# Altium PCB PCB1.PcbDoc
Units mil, origin at the board's own origin, x right, y up, seen from the top; angles counter-clockwise.
Board outline 3570 x 2300 mil, 2 copper layers (Top Layer, Bottom Layer); 32 components, 31 nets, 120 pads, 0 vias.
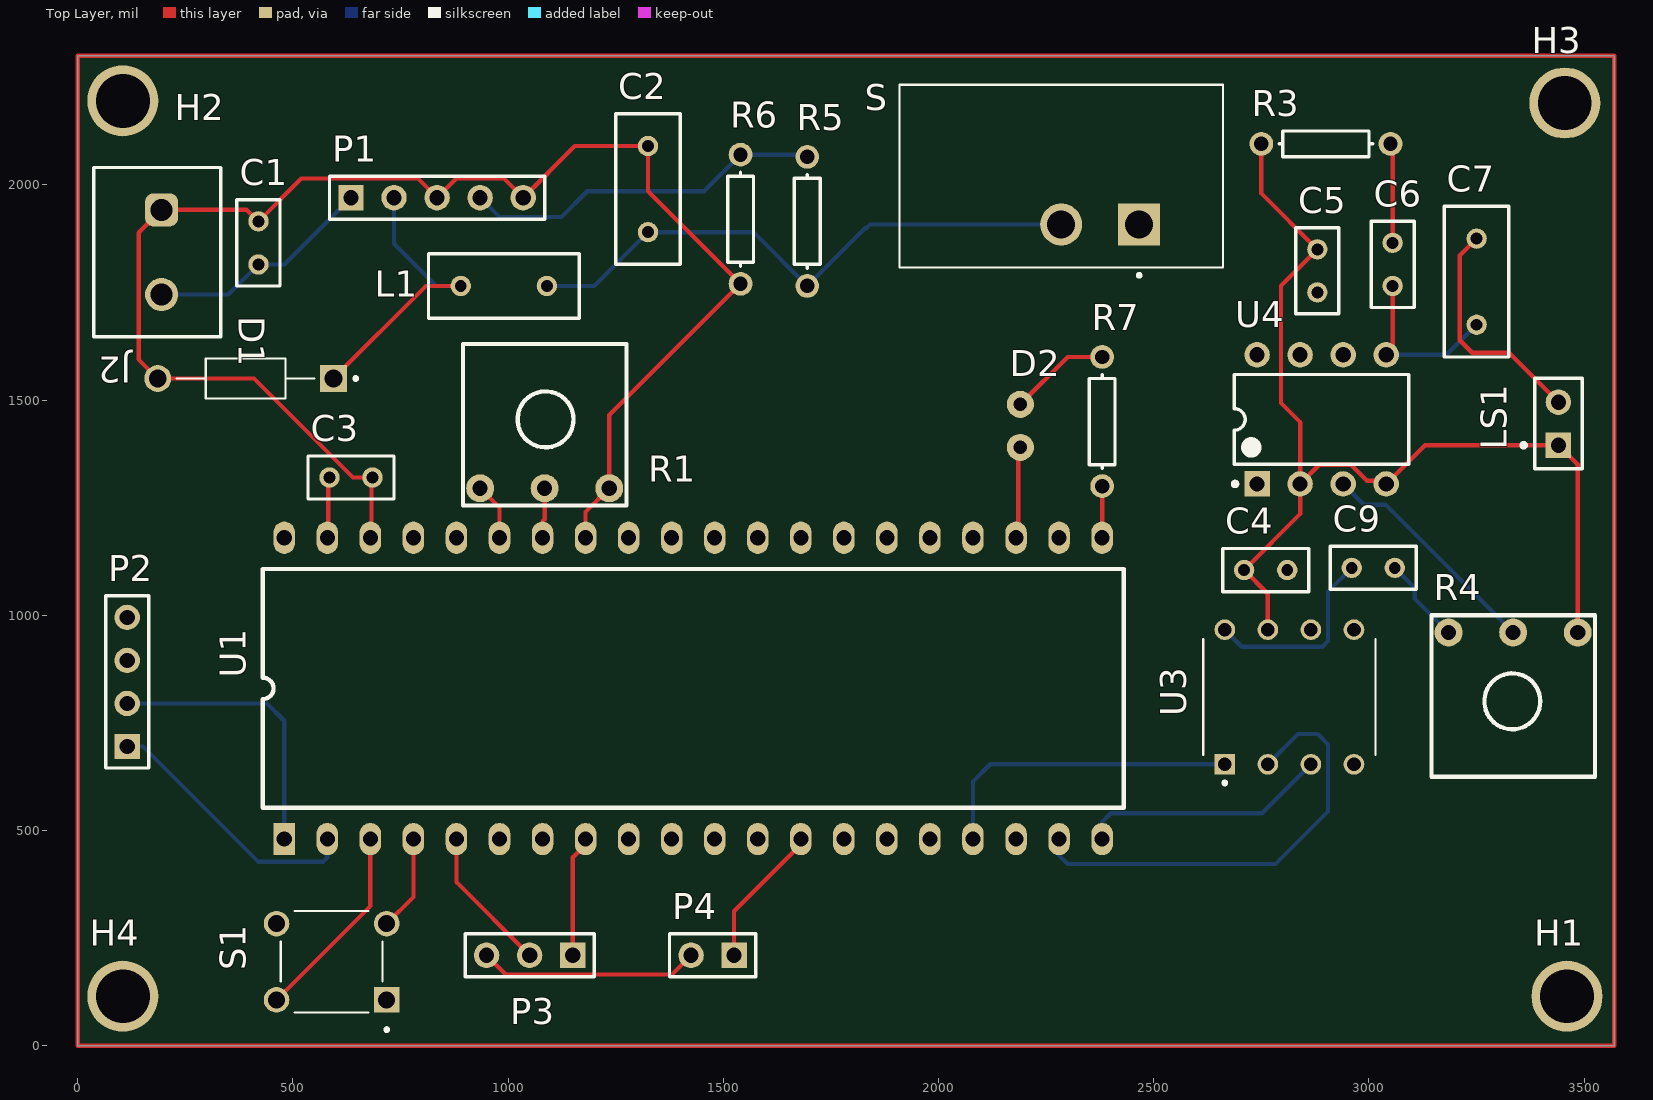
[diagram p0: Top Layer view]
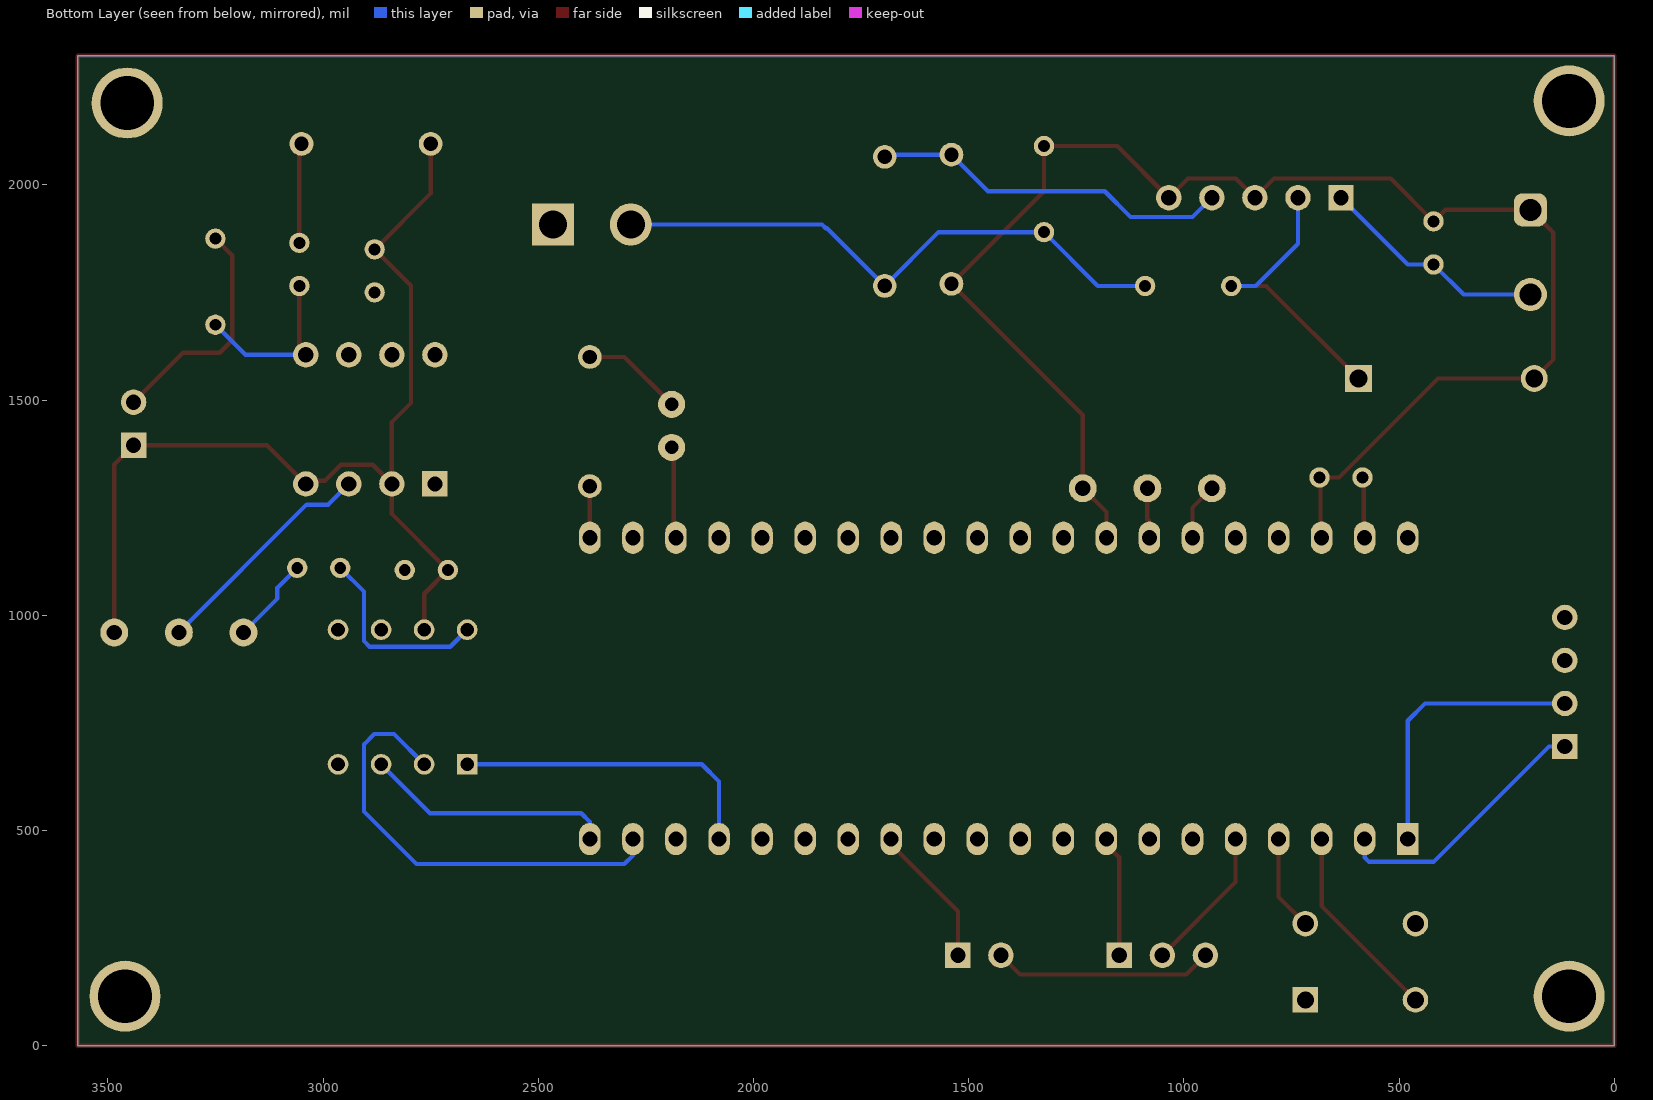
[diagram p1: Bottom Layer view, seen from below]

## Layer stack, top to bottom
Top Solder: solder mask 0.4, Solder Resist, Dk 3.5
Top Layer: signal copper 1.4
Dielectric 1: dielectric 12.6, FR-4, Dk 4.8
Bottom Layer: signal copper 1.4
Bottom Solder: solder mask 0.4, Solder Resist, Dk 3.5

## Board outline
0,0 0,2300 3570,2300 3570,0

## Design rules (kind name [scope] priority, off if disabled: settings)
Clearance [All] p1: gap=10 ignorepadtopadclearanceinfootprint=FALSE
PolygonConnect [All] p1: connectstyle=Relief reliefconductorwidth=10 reliefentries=4 polygonreliefangle="90 Angle" airgapwidth=10
RoutingVias [All] p1: holewidth=28 width=50 viastyle="Through Hole" minholewidth=28 minwidth=50 maxholewidth=28 maxwidth=50
SolderMaskExpansion [All] p1: expansion=4 istentingtop=FALSE
SupplyNets "Schematic Supply Nets_1" [InNet('VCC')] p1: voltage=0.000
SupplyNets "Schematic Supply Nets" [InNet('GND')] p2: voltage=0.000
Width [All] p1: maxlimit=10 minlimit=10 preferedwidth=10
30 further rules are at their usual default settings.

## Components (designator, comment, footprint, x,y, rotation, side; value= is the part's Value field where it differs from the comment)
C1 "Cap" RAD-0.1 420,1865 r90 top value=100uF
C2 "Cap" RAD-0.2 1325,1990 r270 top value=1000uF
C3 "Cap" RAD-0.1 635,1320 r180 top value=10uF
C4 "Cap" RAD-0.1 2760,1105 r180 top value=0.1u
C5 "Cap" RAD-0.1 2880,1800 r90 top value=0.1u
C6 "Cap" RAD-0.1 3055,1815 r90 top value=0.05u
C7 "Cap" RAD-0.2 3250,1775 r90 top value=250u
C9 "Cap" RAD-0.1 3010,1110 r180 top value=1u
D1 "1N5819" DIOAD1036W78L470D235 390,1550 r180 top
D2 "LED1" LED-1 2190,1440 r0 top
H1 "Hole 125mil" "Hole 125mil" 3460,115 r0 top
H2 "Hole 125mil" "Hole 125mil" 105,2195 r0 top
H3 "Hole 125mil" "Hole 125mil" 3455,2190 r0 top
H4 "Hole 125mil" "Hole 125mil" 105,115 r0 top
J2 "691137710002" 691137710002 185.16,1843.43 r270 top
L1 "Inductor" RAD-0.2 990,1765 r0 top value=100uH
LS1 "Speaker" PIN2 3440,1395 r90 top
P1 "Header 5" HDR1X5 635,1970 r0 top
P2 "Header 4" HDR1X4 115,695 r90 top
P3 "Header 3" HDR1X3 1150,210 r180 top
P4 "Header 2H" HDR1X2 1525,210 r180 top
R1 "RPot_1" "POT inline wide" 985,1295 r0 top value=10K
R3 "Res1" AXIAL-0.3 2900,2095 r180 top value=10
R4 "RPot_1" "POT inline wide" 3435,960 r180 top value=10K
R5 "Res1" AXIAL-0.3 1695,1915 r270 top value=3k
R6 "Res1" AXIAL-0.3 1540,1920 r90 top value=1k
R7 "Res1" AXIAL-0.3 2380,1450 r90 top value=1K
S "L101011MS02Q" SW_L101011MS02Q 2285,2020 r180 top
S1 "TS02-66-43-BK-100-LCR-D" SW_TS02-66-43-BK-100-LCR-D 590,195 r180 top
U1 "Raspberry Pi Pico" "Raspberry Pi Pico" 480,480 r90 top
U3 "LTC1661CN8#PBF" DIP794W45P254L1016H393Q8 2815,810 r90 top
U4 "LM386N-1" DIP-8 2890,1455 r90 top

## Footprints (in the part's own frame and the unit in brackets; to place one, negate y for a bottom-side part, rotate by r counter-clockwise, add the part's x,y. Pads: shape width x height; smd on the part's side, far side on the other; paste and mask are expansions set on the pad)
691137710002 [mm] "Horizontal Cable Entry with Pressure Clamp, pitch 5mm, 02p"
  rrect50% 1.95x1.95 hole 1.3: 1(-2.5,0.25)
  round 1.95 hole 1.3: 2(2.5,0.25)
  silkscreen extent -5,-3.75 5,3.75, body extent -5,-3.75 5,3.75, height 11.6
AXIAL-0.3 [mm] "Axial Device, Thru-Hole; 2 Leads; 0.3 in Pin Spacing"
  round 1.4 hole 0.85: 1(-3.81,0) 2(3.81,0)
  silkscreen extent -2.77,-0.76 2.77,0.76
DIOAD1036W78L470D235 [mm]
  round 1.59 hole 1.06: A(5.18,0)
  rect 1.59x1.59 / inner round 1.59 / far side rect 1.59x1.59 hole 1.06: C(-5.18,0)
  silkscreen extent -6.6,-1.18 4.07,1.18, body extent -5.55,-1.4 5.55,1.4, height 2.8
DIP794W45P254L1016H393Q8 [mm]
  rect 1.22x1.22 hole 0.81: 1(-3.97,3.81)
  round 1.22 hole 0.81: 2(-3.97,1.27) 3(-3.97,-1.27) 4(-3.97,-3.81) 5(3.97,-3.81) 6(3.97,-1.27) 7(3.97,1.27) 8(3.97,3.81)
  silkscreen extent -5.17,-5.08 3.43,5.08
DIP-8 [mm]
  rect 1.5x1.5 hole 0.9: 1(-3.81,3.81)
  round 1.5 hole 0.9: 2(-3.81,1.27) 3(-3.81,-1.27) 4(-3.81,-3.81) 5(3.81,-3.81) 6(3.81,-1.27) 7(3.81,1.27) 8(3.81,3.81)
  silkscreen extent -3.93,-5.15 2.65,5.23, body extent -3.6,-5.15 3.6,5.15, height 5.08
HDR1X2 [mm] "Connector; Header; 2 Position"
  rect 1.5x1.5 hole 0.9: 1(0,0)
  round 1.5 hole 0.9: 2(2.54,0)
  silkscreen extent -1.27,-1.27 3.81,1.27
HDR1X3 [mm] "Connector; Header; 3 Position"
  rect 1.5x1.5 hole 0.9: 1(0,0)
  round 1.5 hole 0.9: 2(2.54,0) 3(5.08,0)
  silkscreen extent -1.27,-1.27 6.35,1.27
HDR1X4 [mm] "Connector; Header; 4 Position"
  rect 1.5x1.5 hole 0.9: 1(0,0)
  round 1.5 hole 0.9: 2(2.54,0) 3(5.08,0) 4(7.62,0)
  silkscreen extent -1.27,-1.27 8.89,1.27
HDR1X5 [mm] "Connector; Header; 5 Position"
  rect 1.5x1.5 hole 0.9: 1(0,0)
  round 1.5 hole 0.9: 2(2.54,0) 3(5.08,0) 4(7.62,0) 5(10.16,0)
  silkscreen extent -1.27,-1.27 11.43,1.27
"Hole 125mil" [mil]
  round 165 hole 125: 1(0,0)
LED-1 [mm] "LED; 2 Leads"
  round 1.6 hole 0.8: 1(0,1.27) 2(0,-1.27)
PIN2 [mm] "Photosensitive Diode; 2 Leads"
  rect 1.5x1.5 hole 0.9: 1(0,0)
  round 1.5 hole 0.9: 2(2.54,0)
  silkscreen extent -1.4,-1.4 3.94,2.17
"POT inline wide" [mil]
  round 65 hole 35: 1(-50,0) 2(100,0) 3(250,0)
  silkscreen extent -90,-40 290,335
RAD-0.1 [mm] "Radial Cap, Thru-Hole; 2 Leads; 0.1 in Pin Spacing"
  round 1.2 hole 0.7: 1(-1.27,0) 2(1.27,0)
  silkscreen extent -2.54,-1.27 2.54,1.27
RAD-0.2 [mm] "Radial Cap, Thru-Hole; 2 Leads; 0.2 in Pin Spacing"
  round 1.2 hole 0.7: 1(-2.54,0) 2(2.54,0)
  silkscreen extent -4.44,-1.91 4.44,1.91
"Raspberry Pi Pico" [mil]
  rect 75x50 hole 35: 1(0,0)
  oval 75x50 hole 35: 2(0,-100) 3(0,-200) 4(0,-300) 5(0,-400) 6(0,-500) 7(0,-600) 8(0,-700) 9(0,-800) 10(0,-900) 11(0,-1000) 12(0,-1100) 13(0,-1200) 14(0,-1300) 15(0,-1400) 16(0,-1500) 17(0,-1600) 18(0,-1700) 19(0,-1800) 20(0,-1900) 21(700,-1900) 22(700,-1800) 23(700,-1700) 24(700,-1600) 25(700,-1500) 26(700,-1400) 27(700,-1300) 28(700,-1200) 29(700,-1100) 30(700,-1000) 31(700,-900) 32(700,-800) 33(700,-700) 34(700,-600) 35(700,-500) 36(700,-400) 37(700,-300) 38(700,-200) 39(700,-100) 40(700,0)
  silkscreen extent 72,-1950 628,50
SW_L101011MS02Q [mm]
  rect 2.48x2.48 hole 1.65: 1(-4.6,2.85)
  round 2.48 hole 1.65: 2(0,2.85)
  silkscreen extent -9.55,-5.4 9.55,5.95
SW_TS02-66-43-BK-100-LCR-D [mm]
  rect 1.508x1.508 / inner round 1.508 / far side rect 1.508x1.508 hole 1: 1(-3.25,2.25)
  round 1.508 hole 1: 2(3.25,2.25) 3(-3.25,-2.25) 4(3.25,-2.25)
  silkscreen extent -3.35,-3 3,4.1, body extent -3.95,-3 3.95,3, height 4.3

## Part data
C1 C2 C3 C4 C5 C6 C7 C9: "Capacitor", LatestRevisionDate=17-Jul-2002, LatestRevisionNote="Re-released for DXP Platform.", PackageDescription="Radial Cap, Thru-Hole; 2 Leads; 0.3 in Pin Spacing", PackageReference=RAD-0.3, Published=8-Jun-2000, Publisher="Altium Limited"
D1: "1A, 40V, Planar Schottky", Package="DO-41-2 Taiwan Semiconductor", Check_prices=https://www.snapeda.com/parts/1N5819/taiwan/view-part/?ref=eda, MF="Taiwan Semiconductor", MP=1N5819, SnapEDA_Link=https://www.snapeda.com/parts/1N5819/taiwan/view-part/?ref=snap
D2: "Typical RED GaAs LED", LatestRevisionDate=08-Jul-2005, LatestRevisionNote="Mech Layer 1 removed.", PackageDescription="LED; 2 Leads", PackageReference=LED-1, Published=8-Jun-2000, Publisher="Altium Limited"
J2: "WR-TBL Series 1377 Horizontal Entry, THT, pitch 5mm, 2p", Manufacturer="Wurth Elektronik", Operating Temperature Max=120°C, Operating Temperature Min=-30°C, Rated Current=16A, Working Voltage=300V, Application="Pressure Clamp", Category="Terminal Blocks", ComponentLink1Description="Website Link", ComponentLink1URL=https://www.we-online.com/redexpert/article/691137710002?ad, ComponentLink2Description="Datasheet Link", ComponentLink2URL=https://www.we-online.com/redexpert/spec/691137710002?ad, Manufacturer Part Number=691137710002, Match Code=WR-TBL, Modularity=No, Mount="Through Hole", Number of Pins=2, Number of Rows=1, Orientation=Horizontal, Packaging=Box, Pitch=5mm
LS1: "Loudspeaker", LatestRevisionDate=17-Jul-2002, LatestRevisionNote="Re-released for DXP Platform.", PackageReference=PIN2, Published=24-Mar-1999, Publisher="Altium Limited"
P1: "Header, 5-Pin", LatestRevisionDate=17-Jul-2002, LatestRevisionNote="Re-released for DXP Platform.", Publisher="Altium Limited"
P2: "Header, 4-Pin", LatestRevisionDate=17-Jul-2002, LatestRevisionNote="Re-released for DXP Platform.", Publisher="Altium Limited"
P3: "Header, 3-Pin", LatestRevisionDate=17-Jul-2002, LatestRevisionNote="Re-released for DXP Platform.", Publisher="Altium Limited"
P4: "Header, 2-Pin, Right Angle", LatestRevisionDate=17-Jul-2002, LatestRevisionNote="Re-released for DXP Platform.", Publisher="Altium Limited"
R1 R4: library part RPot_3, "Potentiometer", LatestRevisionDate=17-Jul-2002, LatestRevisionNote="Re-released for DXP Platform.", PackageDescription="Variable Resistor, Thru-Hole; 3 Leads", PackageReference=VR5, Published=8-Jun-2000, Publisher="Altium Limited", Set Position=0.5, Sim Note="Enter the Resistance value and the set point into parameter fields."
R3 R5 R6 R7: "Resistor", LatestRevisionDate=17-Jul-2002, LatestRevisionNote="Re-released for DXP Platform.", PackageDescription="Axial Device, Thru-Hole; 2 Leads; 0.3 in Pin Spacing", PackageReference=AXIAL-0.3, Published=8-Jun-2000, Publisher="Altium Limited"
S: "Slide Switch SPST Through Hole", Package=None, Availability=Unavailable, MF=C&K, MP=L101011MS02Q, Price=None, SnapEDA_Link=https://www.snapeda.com/parts/L101011MS02Q/C%26K/view-part/455586/?ref=snap
S1: "6 x 6 mm, 4.3 mm Actuator Height, 100 gf, Black, Long Crimped, Through Hole, SPST, Tactile Switch", Package=None, Check_prices=https://www.snapeda.com/parts/TS02-66-43-BK-100-LCR-D/Same+Sky/view-part/?ref=eda, MF="Same Sky", MP=TS02-66-43-BK-100-LCR-D, SnapEDA_Link=https://www.snapeda.com/parts/TS02-66-43-BK-100-LCR-D/Same+Sky/view-part/?ref=snap
U3: "10 Bit Digital to Analog Converter 2 8-PDIP", Package="PDIP -8 Analog Devices", Availability=Warning, BuyPart=https://www.snapeda.com/parts/LTC1661CN8%23PBF/Analog%20Devices/view-part/4346247/?ref=eda, DigiKey-Purchase-URL=https://snapeda.com/shop?store=DigiKey&id=4346247, MF="Analog Devices", Mouser-Purchase-URL=https://snapeda.com/shop?store=Mouser&id=4346247, MP=LTC1661CN8#PBF, Price=None, SnapEDA_Link=https://www.snapeda.com/parts/LTC1661CN8%23PBF/Analog%20Devices/view-part/4346247/?ref=snap
U4: "Low-Voltage Audio Power Amplifier", PackageDocument=Sep-1997, DatasheetDocument=Sep-1997, PackageReference=N08E, Published=15-Apr-2002, Publisher="Altium Limited"
L1: Code_IEC=1005, Code_JEITA=0402, LatestRevisionDate=29-May-2009, LatestRevisionNote="IPC-7351 Footprint Added.", PackageDescription="Chip Inductor", PackageReference=0402-A, Published=8-Jun-2000, Publisher="Altium Limited"

## Nets (pads, with @x,y where several pads share a name; then routed paths per layer and width w, separated by ;. In a path a pad name is that pad's centre, name@x,y a point inside that pad or via, vN(x,y) a via of type N, cw(c..) or ccw(c..) an arc to the next point about the centre after c; other vN are vias at no path point)
ADC: R1.2 U1.34 | length 117.1
  Top Layer w10: U1.34 1080,1218 1085,1223 R1.2
ADC_REF: R1.1 U1.35 | length 133.6
  Top Layer w10: R1.1 980,1250 U1.35
BeamBreak_Pin: P3.2 U1.5 | length 340.4
  Top Layer w10: U1.5 880,380 P3.2
CS: U1.17 U3.1 | length 735.3
  Bottom Layer w10: U1.17 2080,613.7 2120,653.7 U3.1
GND: C1.2 C2.1 C3.1 C4.2 C5.2 D1.A D2.2 J2.1 LS1.1 P1.3 P1.5 P2.3 P3.1 P4.1 R1.3 R3.2 R4.1 R6.1 S1.2 U1.3 U1.8 U1.13 U1.18 U1.23 U1.28 U1.33 U1.38 U3.7 U4.2 U4.4 | length 7351.8
  Top Layer w10: S1.2 680,324.37 U1.3 ; U1.38 682.5,1182.5 682.5,1317.5 C3.1 639.62,1320 409.62,1550 D1.A 141.61,1594.45 141.61,1888.46 J2.1 392.23,1941.85 419.08,1915 C1.2 519.53,2014.53 790.47,2014.53 P1.3 879.53,2014.53 990.47,2014.53 P1.5 1155,2090 C2.1 1325,1985 R6.1 1235,1465 R1.3 1180,1240 U1.33 ; P3.1 1150,437.5 1180,467.5 U1.8 ; P4.1 1525,312.5 1680,467.5 U1.13 ; U1.23@2180,1192.5 U1.23 2185,1185 2185,1385 D2.2 ; R3.2 2750,1980 C5.2 2795.47,1765.47 2795.47,1493.12 2840,1448.6 U4.2 ; U3.7 2765,1050 C4.2 2840,1235 U4.2 ; R4.1 3485,1350 LS1.1 3130,1395 U4.4 3032.5,1312.5 2995.47,1312.5 2958.44,1349.53 2884.53,1349.53 U4.2
MOSI: U1.20 U3.3 | length 580.4
  Bottom Layer w10: U1.20 2380,520 2400,540 2751.3,540 U3.3
NetC6_1: C6.1 C7.1 U4.5 | length 405.2
  Top Layer w10: U4.5 3055,1620 C6.1
  Bottom Layer w10: U4.5 3180,1605 C7.1
NetC6_2: C6.2 R3.1 | length 235
  Top Layer w10: R3.1 3055,2095 C6.2
NetC7_2: C7.2 LS1.2 | length 540.8
  Top Layer w10: C7.2 3211,1836 3211,1639 3240,1610 3325,1610 LS1.2
NetC9_1: C9.1 R4.3 | length 201.8
  Bottom Layer w10: C9.1 3106,1064 3106,1039 R4.3
NetC9_2: C9.2 U3.8 | length 454.4
  Bottom Layer w10: U3.8 2704.3,927 2892,927 2905,940 2905,1055 C9.2
NetD1_C: D1.C L1.1 P1.2 | length 687.7
  Top Layer w10: D1.C 808.94,1765 L1.1
  Bottom Layer w10: P1.2 735,1863 833,1765 L1.1
NetD2_1: D2.1 R7.2 | length 241.3
  Top Layer w10: D2.1 2300,1600 R7.2 R7.2@2374.24,1600
NetDS1_3: 
NetDS1_4: 
NetDS1_5: 
NetDS1_6: 
NetDS1_7: 
NetDS1_8: 
NetDS1_9: 
NetDS1_10: 
NetP1_4: P1.4 R5.1 R6.2 | length 843.7
  Bottom Layer w10: P1.4 980,1925 1124,1925 1184,1985 1455,1985 R6.2 1695,2070 R5.1
NetR4_2: R4.2 U4.3 | length 537.9
  Bottom Layer w10: U4.3 2988,1257 3038,1257 R4.2
NetR7_1: R7.1 U1.21 | length 120
  Top Layer w10: U1.21 R7.1
NetS1_3: S1.3 U1.4 | length 222.1
  Top Layer w10: S1.3 780,345.63 U1.4
PWR_IN: C2.2 L1.2 R5.2 S.2 | length 1357.7
  Bottom Layer w10: L1.2 1200,1765 C2.2 1570,1890 R5.2 1829,1899 1832,1899 1840.8,1907.8 S.2
SCK: U1.19 U3.2 | length 1056.9
  Bottom Layer w10: U1.19 2280,442 2300,422 2783,422 2905,544 2905,700 2881,724 2835.3,724 U3.2
SCL: P2.1 U1.2 | length 623.2
  Bottom Layer w10: P2.1 152,695 420,427 570,427 580,437 U1.2
SDA: P2.2 U1.1 | length 656.6
  Bottom Layer w10: P2.2 440,795 480,755 U1.1
VCC: C3.2 C4.1 C5.1 P2.4 P3.3 P4.2 S.1 U1.39 U3.4 U3.6 U4.6 | length 654
  Top Layer w10: U1.39 582.5,1182.5 582.5,1317.5 C3.2 ; P3.3 994.53,165.47 1380.47,165.47 P4.2
Vin: C1.1 J2.2 P1.1 | length 533.2
  Bottom Layer w10: J2.2 350,1745 C1.1 480,1815 P1.1
pads on no net: H1.1 H2.1 H3.1 H4.1 S1.1 S1.4 U1.6 U1.7 U1.9 U1.10 U1.11 U1.12 U1.14 U1.15 U1.16 U1.22 U1.24 U1.25 U1.26 U1.27 U1.29 U1.30 U1.31 U1.32 U1.36 U1.37 U1.40 U3.5 U4.1 U4.7 U4.8
copper on no net: | length 11740
  Top Layer w10: 0,0 3570,0 3570,2300 0,2300 0,0

## Polygon pours and split planes (outlines as drawn)
GND on Bottom Layer "NONET_L02_P000" (hatched Horizontal grid 20 track 8, shelved, pour order 0): 0,2300 0,0 3570,0 3570,2300
VCC on Top Layer "NONET_L01_P001" (hatched Horizontal grid 20 track 8, shelved, pour order 1): 0,2300 0,0 3570,0 3570,2300